# Altium PCB SimpleNYT.PcbDoc
Units mm, origin at the board's own origin, x right, y up, seen from the top; angles counter-clockwise.
Board outline 39 x 40 mm, 2 copper layers (Top Layer, Bottom Layer); 48 components, 44 nets, 166 pads, 2 vias.
Unrouted connection lines stored in the file: 1.
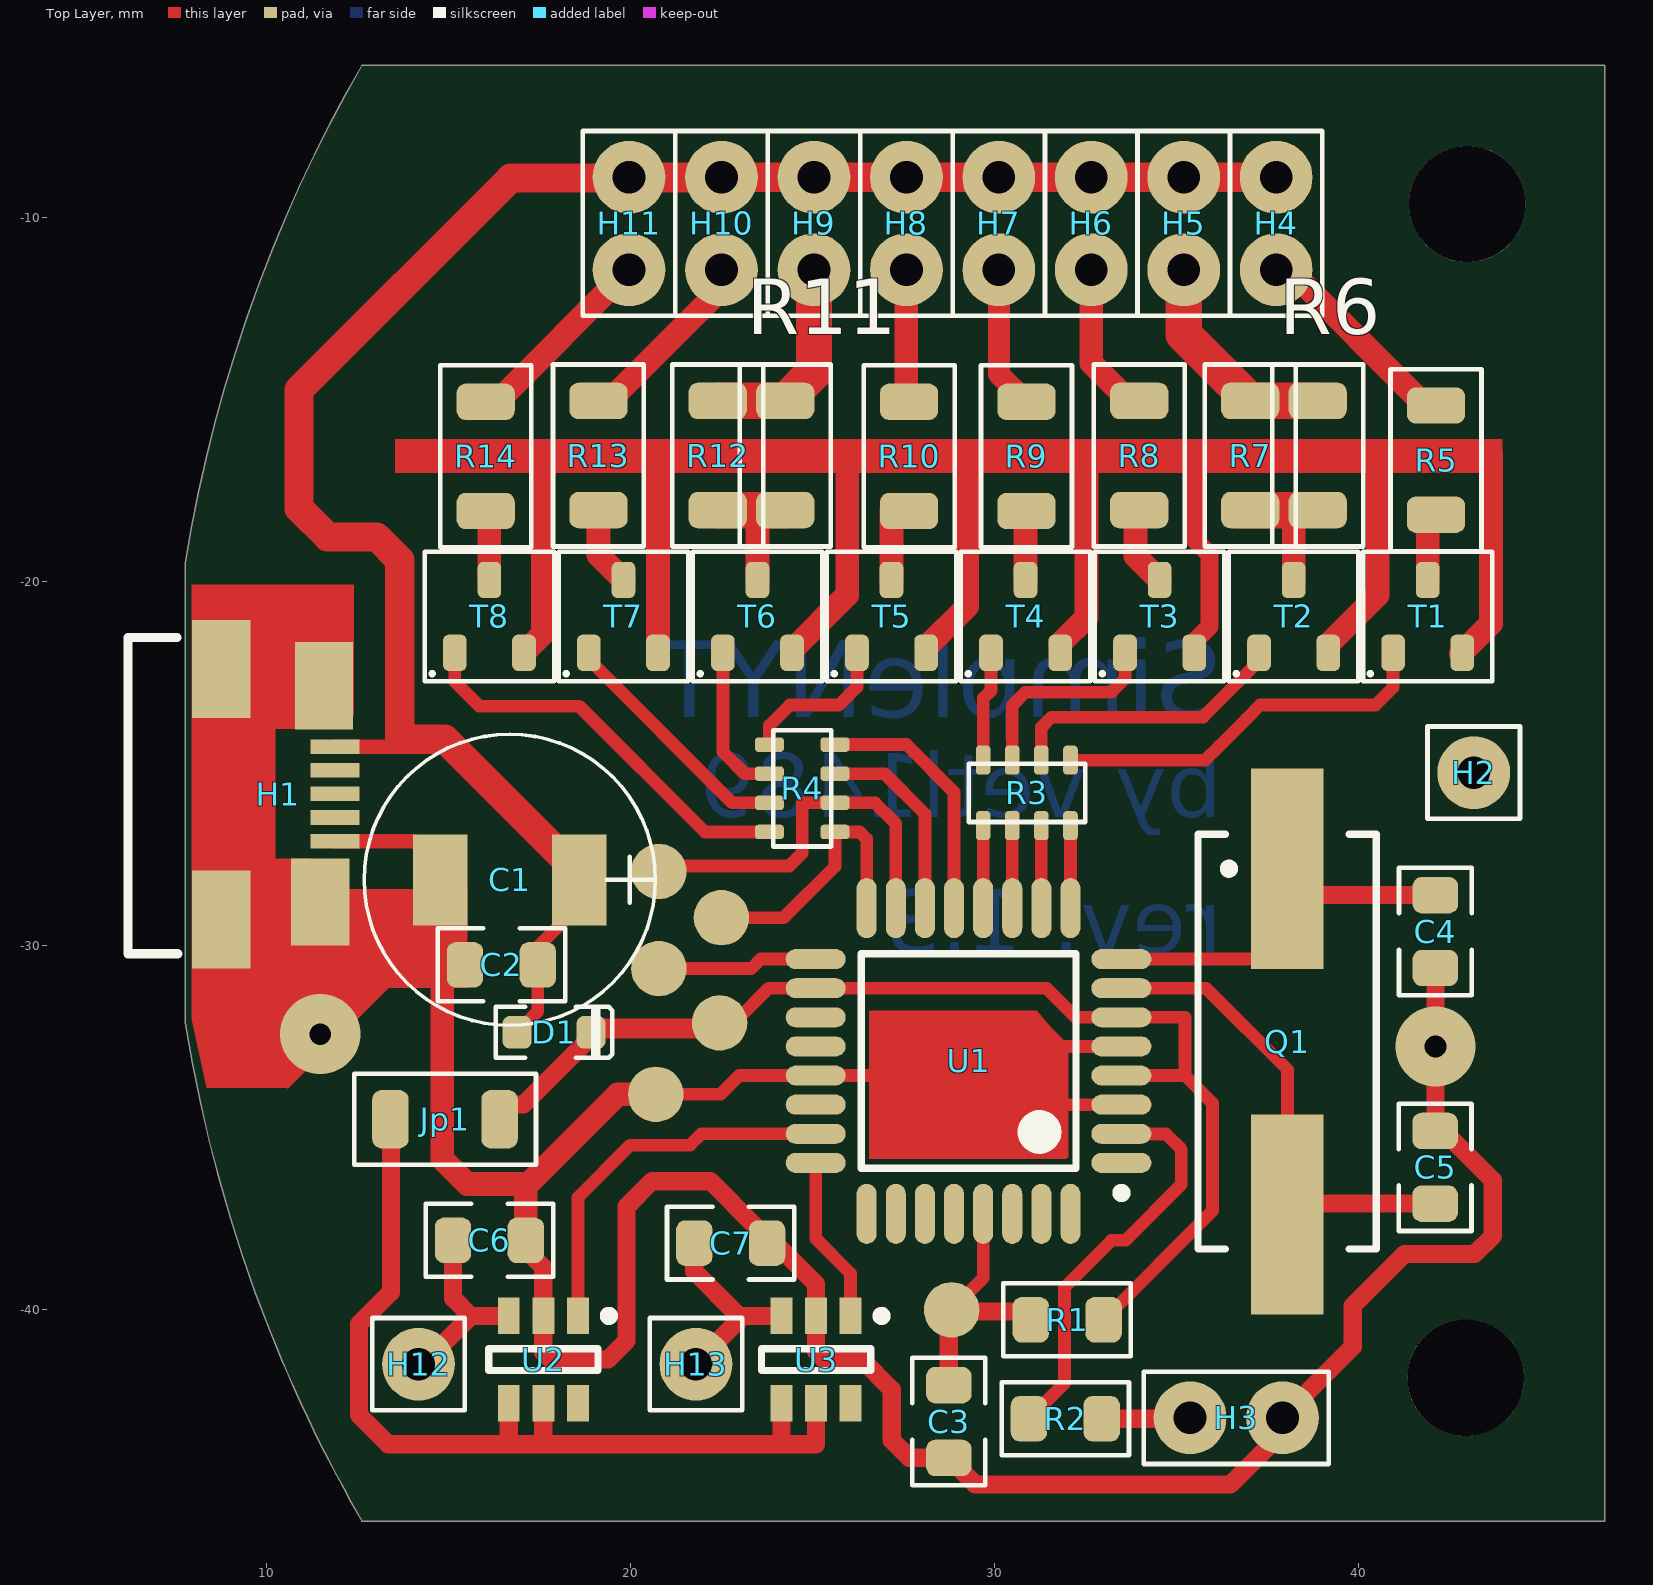
[diagram p0: Top Layer view]
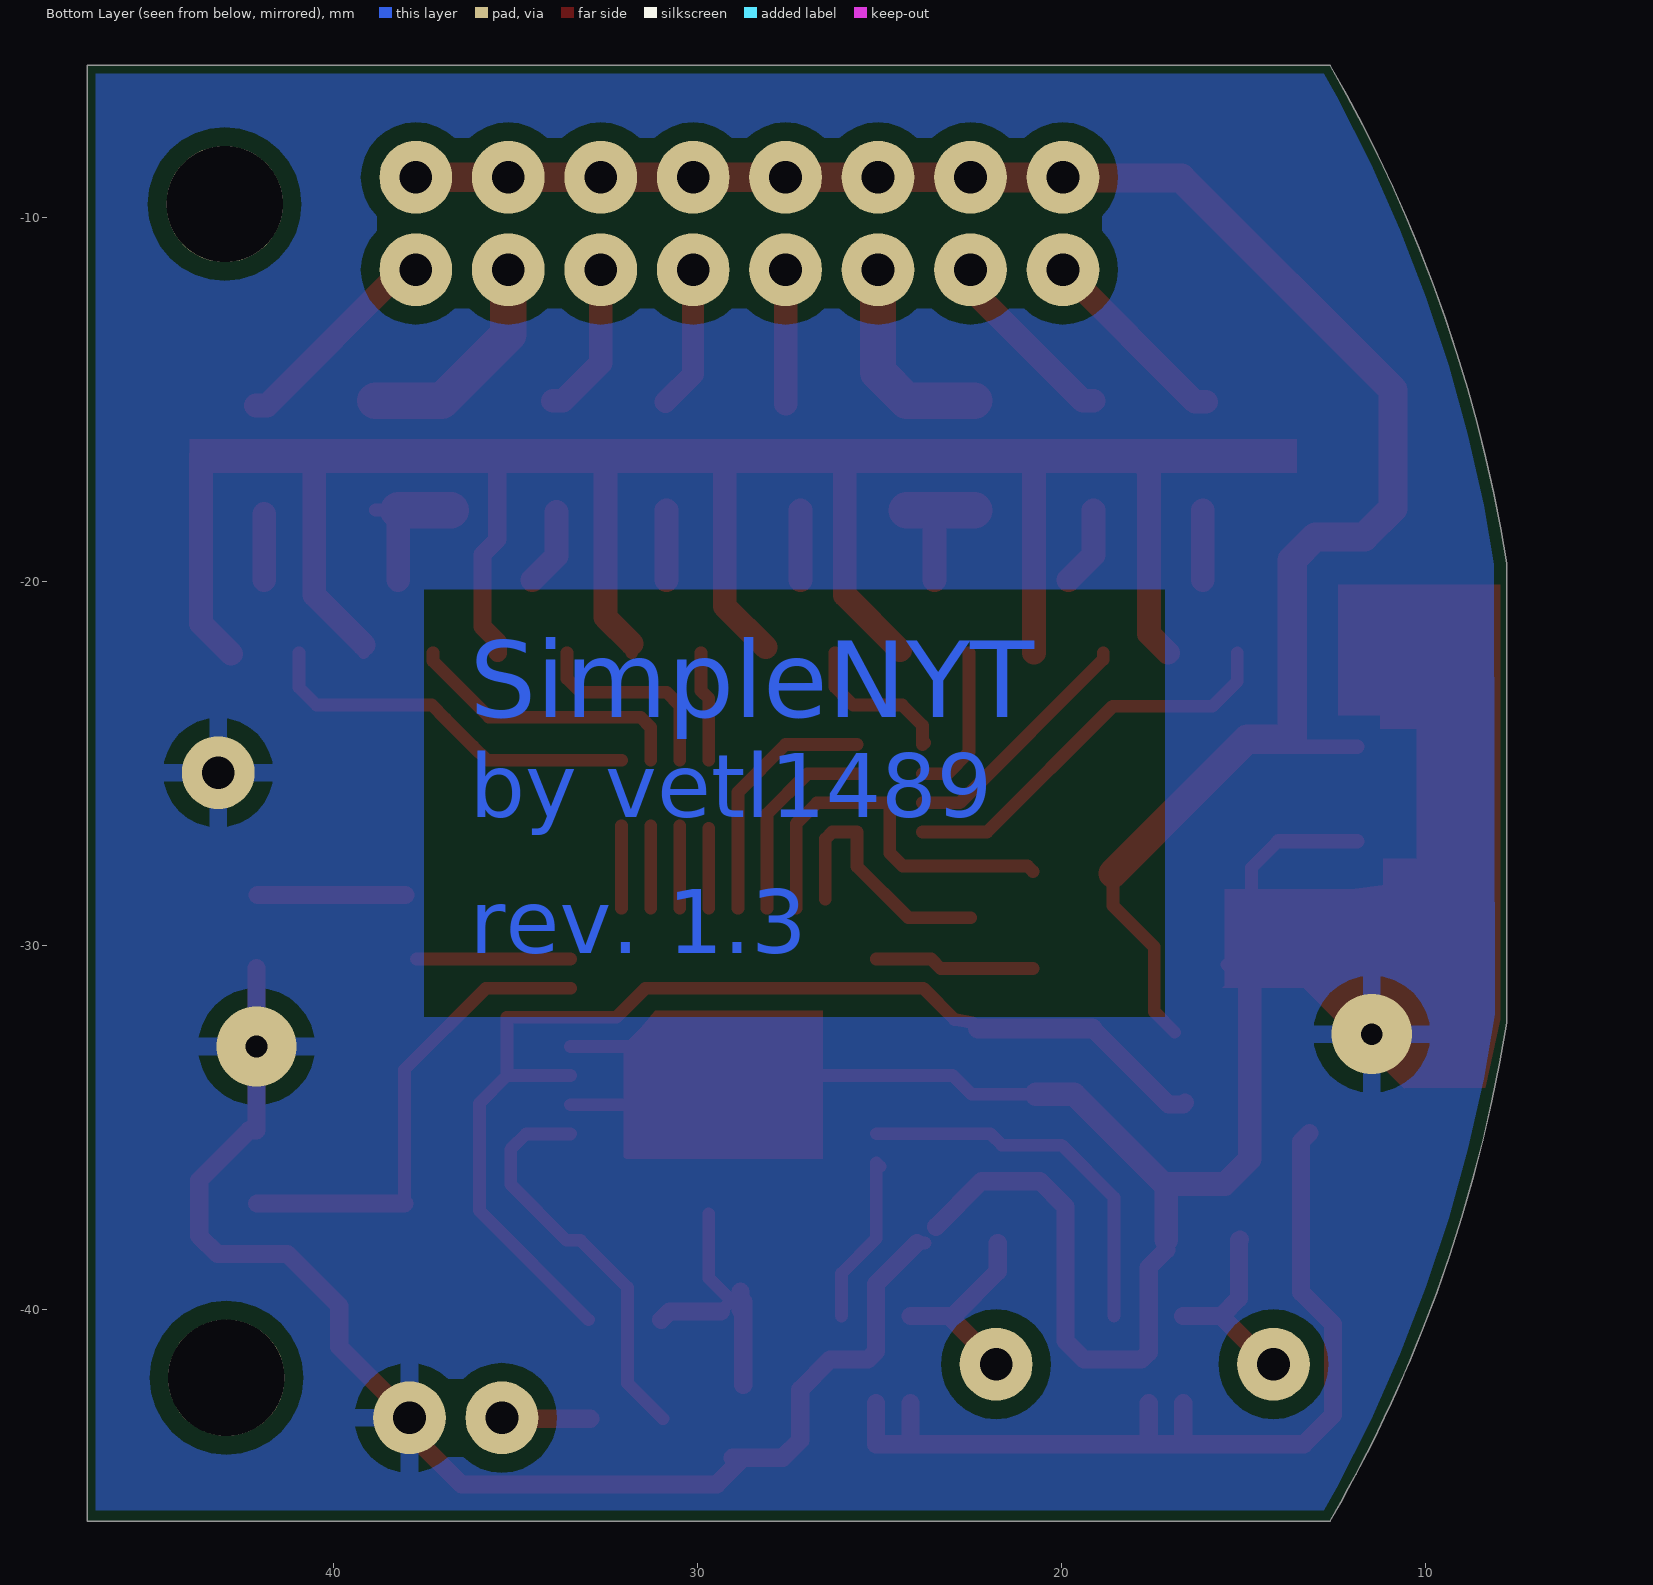
[diagram p1: Bottom Layer view, seen from below]
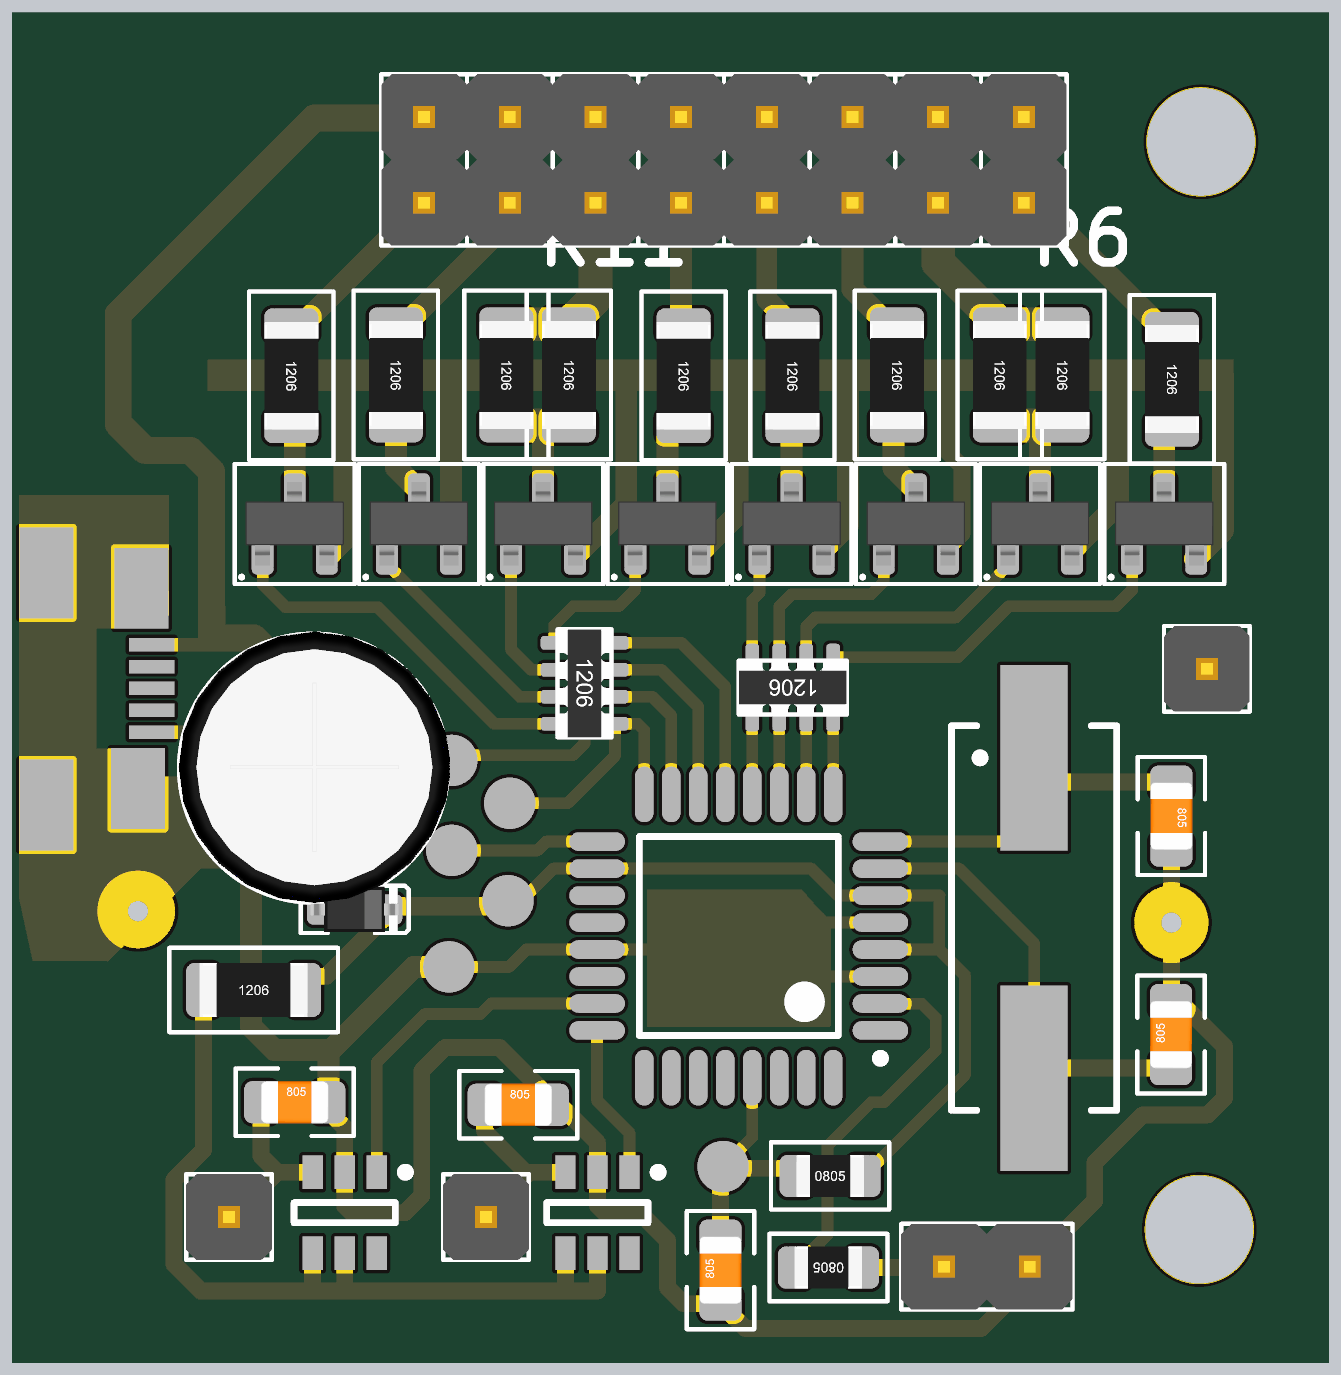
[diagram p2: 3D render of the assembled board from above, using the file's embedded part models]

## Layer stack, top to bottom
Top Solder: solder mask 0.0102, Solder Resist, Dk 3.5
Top Layer: signal copper 0.0356
Dielectric 1: dielectric 0.32, FR-4, Dk 4.8
Bottom Layer: signal copper 0.0356
Bottom Solder: solder mask 0.0102, Solder Resist, Dk 3.5

## Board outline
10.425,-41.383 cw(c48.201,-25.429) 10.092,-40.57 cw(c46.989,-25.907) 7.775,-32.125 7.775,-19.5 cw(c47.03,-25.731) 8.845,-14.7 cw(c47.291,-25.798) 10.171,-10.852 cw(c46.93,-25.651) 12.628,-5.812 46.775,-5.812 46.775,-45.812 12.628,-45.812 12.335,-45.298 cw(c46.396,-26.284) 11.913,-44.522 cw(c46.742,-26.101) 11.514,-43.746 cw(c47.096,-25.924) 11.134,-42.966 cw(c47.457,-25.753) 10.77,-42.176 cw(c47.825,-25.588)

## Design rules (kind name [scope] priority, off if disabled: settings)
Clearance Clearance_Polygon [InNet('GND') And InPolygon] p1: gap=0.5
Clearance [All] p2: gap=0.25
PlaneConnect [All] p1: planeconnectstyle=Relief reliefexpansion=0.508 reliefentries=4 reliefconductorwidth=0.35 reliefairgap=0.5
PolygonConnect [All] p1: connectstyle=Relief reliefconductorwidth=0.5 reliefentries=4 polygonreliefangle="90 Angle" airgapwidth=0.5
RoutingVias [All] p1: holewidth=0.711 width=1.27 viastyle="Through Hole" minholewidth=0.711 minwidth=1.27 maxholewidth=0.711 maxwidth=1.27
SolderMaskExpansion [All] p1: expansion=0.102
Width [All] p1: maxlimit=5.254 minlimit=0.254 preferedwidth=0.254
29 further rules are at their usual default settings.

## Components (designator, comment, footprint, x,y, rotation, side; value= is the part's Value field where it differs from the comment)
C1 "470u" El-d8-h12-F3.81 16.688,-28.194 r0 top
C2 "1u" C0805(2013) 16.459,-30.531 r180 top
C3 "100n" C0805(2013) 28.753,-43.078 r90 top
C4 "22p" C0805(2013) 42.122,-29.616 r270 top
C5 "22p" C0805(2013) 42.113,-36.093 r90 top
C6 "47p" C0805(2013) 16.129,-38.1 r0 top
C7 "47p" C0805(2013) 22.758,-38.176 r0 top
D1 "1N4148" SOD323 17.907,-32.385 r0 top
H1 "Micro USB B" DX4R005H91 9.804,-25.832 r270 top
H2 "H-1" J1 43.175,-25.25 r180 top
H3 "H-1x2" J1x2 36.652,-42.977 r0 top
H4 "H-1x2" J1x2 37.747,-10.16 r90 top
H5 "H-1x2" J1x2 35.207,-10.16 r90 top
H6 "H-1x2" J1x2 32.667,-10.16 r90 top
H7 "H-1x2" J1x2 30.127,-10.16 r90 top
H8 "H-1x2" J1x2 27.587,-10.16 r90 top
H9 "H-1x2" J1x2 25.047,-10.16 r90 top
H10 "H-1x2" J1x2 22.507,-10.16 r90 top
H11 "H-1x2" J1x2 19.967,-10.16 r90 top
H12 "H-1" J1 14.182,-41.503 r90 top
H13 "H-1" J1 21.802,-41.503 r90 top
Jp1 "0" J-1206 14.91,-34.773 r0 top
Q1 "16 MHz" HC49/4H_SMX 38.049,-32.639 r270 top
R1 "10k" R0805 32.004,-40.284 r0 top
R2 "1k" R0805 31.953,-43.002 r180 top
R3 "1k" RM4x0603 30.895,-25.806 r270 top
R4 "1k" RM4x0603 24.723,-25.679 r0 top
R5 "470" R1206 42.139,-16.662 r270 top
R6 "62" R1206 38.887,-16.535 r270 top
R7 "62" R1206 37.033,-16.535 r270 top
R8 "240" R1206 33.985,-16.535 r270 top
R9 "330" R1206 30.886,-16.561 r270 top
R10 "470" R1206 27.661,-16.561 r270 top
R11 "62" R1206 24.257,-16.535 r270 top
R12 "62" R1206 22.403,-16.535 r270 top
R13 "240" R1206 19.126,-16.535 r270 top
R14 "330" R1206 16.027,-16.561 r270 top
T1 "2N3904" SOT23 41.91,-20.955 r0 top
T2 "2N3904" SOT23 38.227,-20.955 r0 top
T3 "2N3904" SOT23 34.544,-20.955 r0 top
T4 "2N3904" SOT23 30.861,-20.955 r0 top
T5 "2N3904" SOT23 27.178,-20.955 r0 top
T6 "2N3904" SOT23 23.495,-20.955 r0 top
T7 "2N3904" SOT23 19.812,-20.955 r0 top
T8 "2N3904" SOT23 16.129,-20.955 r0 top
U1 "ATmega88A-AU" 32A_N 29.295,-33.172 r180 top
U2 "TTP223-BA6" SOT23-6 17.611,-41.376 r270 top
U3 "TTP223-BA6" SOT23-6 25.104,-41.376 r270 top

## Footprints (in the part's own frame and the unit in brackets; to place one, negate y for a bottom-side part, rotate by r counter-clockwise, add the part's x,y. Pads: shape width x height; smd on the part's side, far side on the other; paste and mask are expansions set on the pad)
32A_N [mm] "Thin QFP, 32-Leads, Body 7x7mm, Pitch 0.8mm, IPC Medium Density"
  oval 1.65x0.55 smd: 1(-4.2,2.8) 2(-4.2,2) 3(-4.2,1.2) 4(-4.2,0.4) 5(-4.2,-0.4) 6(-4.2,-1.2) 7(-4.2,-2) 8(-4.2,-2.8) 17(4.2,-2.8) 18(4.2,-2) 19(4.2,-1.2) 20(4.2,-0.4) 21(4.2,0.4) 22(4.2,1.2) 23(4.2,2) 24(4.2,2.8)
  oval 0.55x1.65 smd: 9(-2.8,-4.2) 10(-2,-4.2) 11(-1.2,-4.2) 12(-0.4,-4.2) 13(0.4,-4.2) 14(1.2,-4.2) 15(2,-4.2) 16(2.8,-4.2) 25(2.8,4.2) 26(2,4.2) 27(1.2,4.2) 28(0.4,4.2) 29(-0.4,4.2) 30(-1.2,4.2) 31(-2,4.2) 32(-2.8,4.2)
  silkscreen extent -4.33,-2.95 2.95,3.75, body extent -3.5,-3.5 3.5,3.5, height 1.2
C0805(2013) [mm]
  rrect50% 1x1.25 smd: 1(-1,0) 2(1,0)
  silkscreen extent -1.75,-1 1.75,1, body extent -1,-0.62 1,0.63, height 0.73
DX4R005H91 [mm]
  rect 0.4x1.35 smd: 1(-1.3,2.083) 2(-0.65,2.083) 3(0,2.083) 4(0.65,2.083) 5(1.3,2.083)
  rect 2.7x1.6 smd: 6(-3.429,-1.041) 6(3.454,-1.041)
  rect 2.4x1.6 smd: 6(-2.972,1.778) 6(2.972,1.676)
  Top Layer region: -4.775,-1.854 4.801,-1.854 4.801,0.446 -4.775,0.446
  Top Layer region: 1.778,-0.66 4.166,-0.66 4.166,1.372 1.778,1.372
  Top Layer region: -4.166,-0.229 -1.778,-0.229 -1.778,1.448 -4.166,1.448
  silkscreen extent -4.29,-3.61 4.39,-2.24
El-d8-h12-F3.81 [mm]
  rect 1.5x2.5 smd: 1(1.905,0) 2(-1.905,0)
  silkscreen extent -4,-4 4,4, body extent -4,-4 4.05,4.05, height 12.53
HC49/4H_SMX [mm] "Surface Mount Quartz Crystal; Body 13.4 (inc. leads) x 4.9 mm (LxW max)"
  rect 5.5x2 smd: 1(-4.75,0) 2(4.75,0)
  silkscreen extent -5.7,-2.45 5.7,2.45
J1 [mm]
  round 2 hole 0.9: 1(0,0)
  silkscreen extent -1.27,-1.27 1.27,1.27, body extent -1.27,-1.27 1.27,1.27, height 10.1
J1x2 [mm]
  round 2 hole 0.9: 1(-1.27,0) 2(1.27,0)
  silkscreen extent -2.54,-1.27 2.54,1.27, body extent -2.54,-1.27 2.54,1.27, height 10.1
J-1206 [mm]
  rrect50% 1x1.6 smd: 1(-1.5,0) 2(1.5,0)
  silkscreen extent -2.5,-1.25 2.5,1.25, body extent -1.6,-0.8 1.6,0.8, height 0.6
R0805 [mm]
  rrect50% 1x1.25 smd: 1(-1,0) 2(1,0)
  silkscreen extent -1.75,-1 1.75,1, body extent -1,-0.62 1,0.63, height 0.6
R1206 [mm]
  rrect50% 1x1.6 smd: 1(-1.5,0) 2(1.5,0)
  silkscreen extent -2.5,-1.25 2.5,1.25, body extent -1.6,-0.8 1.6,0.8, height 0.6
RM4x0603 [mm]
  rrect50% 0.8x0.4 smd: 1(-0.9,1.2) 2(-0.9,0.4) 3(-0.9,-0.4) 4(-0.9,-1.2) 5(0.9,-1.2) 6(0.9,-0.4) 7(0.9,0.4) 8(0.9,1.2)
  silkscreen extent -0.8,-1.6 0.8,1.6, body extent -0.8,-1.6 0.8,1.6, height 0.5
SOD323 [mm]
  rrect50% 0.8x0.9 smd: 1(-1.016,0) 2(1.016,0)
  silkscreen extent -1.6,-0.76 1.6,0.7, body extent -1.3,-0.67 1.3,0.67, height 1.1
SOT23 [mm] "SOT-23; 3 Leads; Body 3.0 x 2.6 mm Pitch 0.95mm"
  rrect50% 0.65x1 smd: 1(-0.95,-1) 2(0.95,-1) 3(0,1)
  silkscreen extent -1.78,-1.78 1.78,1.78, body extent -1.46,-1.23 1.46,1.24, height 1
SOT23-6 [mm] "SOT23, 6-Leads, Body 2,90x2,45mm, Pitch 0,95mm, IPC Medium Density"
  rect 1x0.6 smd: 1(-1.2,0.95) 2(-1.2,0) 3(-1.2,-0.95) 4(1.2,-0.95) 5(1.2,0) 6(1.2,0.95)
  silkscreen extent -1.32,-1.5 0.3,1.93, body extent -0.7,-1.5 0.7,1.5, height 1.1

## Part data
C1: library part 470u-16V, "16V"
C2 C3 C4 C5 C6 C7: library part C-0805, "SMD-0805"
D1: "DO-35 75V 0.2A 1uS 4A 4nS"
H1: "DX4R005H91"
Jp1: library part Jp-1206, "SMD-1206-om"
Q1: library part HC49/4H_SMX, "Surface Mount Quartz Crystal"
R1 R2: library part R-0805, "SMD 0805 0.1W 5% 150V"
R3 R4: library part 4RM-0603, "SMD 4RM-0603 1\16W 5%"
R5 R6 R7 R8 R9 R10 R11 R12 R13 R14: library part R-1206, "SMD 1206 0.125W 5% 200V"
T1 T2 T3 T4 T5 T6 T7 T8: library part BC847C, "SMD-SOT23"
U1: "8-bit AVR Microcontroller, 8KB Flash, 512 Bytes EEPROM, 1KB SRAM, 32-pin TQFP, Industrial Grade (-40°C to 85°C)"
U2 U3: "Touch pad detector IC"

## Free pads (board coordinates)
  round 1.524 smd: 2(20.701,-34.087) 2(20.786,-30.632) 2(20.786,-27.965) 2(22.454,-32.126) 2(22.504,-29.235) 2(28.829,-40.009)
  round 3.2 hole 3.2: 3(42.95,-41.875) 3(43,-9.625)

## Via types
v1: diameter 2.2/2.2 (per signal layer), hole 0.6, Top Layer to Bottom Layer, 1 vias
v2: diameter 2.2, hole 0.6, Top Layer to Bottom Layer, 1 vias

## Nets (pads, with @x,y where several pads share a name; then routed paths per layer and width w, separated by ;. In a path a pad name is that pad's centre, name@x,y a point inside that pad or via, vN(x,y) a via of type N, cw(c..) or ccw(c..) an arc to the next point about the centre after c; other vN are vias at no path point)
CH1: R3.8 U1.9 | length 2.3
  Top Layer w0.35: U1.9 R3.8
CH2: R3.7 U1.10 | length 2.3
  Top Layer w0.35: U1.10 R3.7
CH3: R3.6 U1.11 | length 2.3
  Top Layer w0.35: U1.11 R3.6@30.495,-26.706
CH4: R3.5 U1.12 | length 2.2
  Top Layer w0.35: U1.12 R3.5@29.695,-26.782
CH5: R4.8 U1.13 | length 7
  Top Layer w0.35: R4.8 27.587,-24.479 28.895,-25.787 U1.13
CH6: R4.7 U1.14 | length 5.5
  Top Layer w0.35: R4.7 26.99,-25.279 28.095,-26.384 U1.14
FDBCK: R2.2 U1.2 | length 11.2
  Top Layer w0.35: R2.2 31.928,-42.028 31.928,-40.941 31.929,-40.94 31.929,-39.394 33.223,-38.1 33.604,-38.1 35.137,-36.567 35.137,-35.594 34.721,-35.179 33.502,-35.179 U1.2
GND: C1.2 C2.2 C3.1 C4.2 C5.2 C6.2 C7.2 H1.5 H1.6 H2.1 H3.2 pad.2@20.701,-34.087 T1.2 T2.2 T3.2 T4.2 T5.2 T6.2 T7.2 T8.2 U1.3 U1.5 U1.21 U2.2 U3.2 | length 141.8
  Top Layer w0.35: H1.6@8.763,-29.286 9.246,-28.804 H1.6@11.481,-28.804 ; H1.6@8.763,-22.403 11.125,-22.403 H1.6@11.582,-22.86 ; C1.2@14.051,-27.132 14.783,-27.864 14.783,-29.854 C2.2 14.834,-31.156 ; C6.2@17.129,-38.363 C6.2 ; pad.2@20.701,-34.087 22.479,-34.087 22.994,-33.572 U1.21 31.695,-33.572 31.714,-33.553 ; C7.2 C7.2@23.978,-38.176 ; T6.2 T6.2@24.445,-21.885 ; 25.375,-16.459 25.959,-17.043 ; T5.2 T5.2@28.128,-21.808 ; T4.2 T4.2@31.811,-21.707 ; U1.3 31.816,-34.372 31.714,-34.271 31.714,-33.553 ; U1.5 31.714,-32.772 31.714,-33.553 ; T2.2 T2.2@39.177,-21.732 ; T1.2@42.821,-21.98 T1.2@42.821,-21.808
  Top Layer w0.4: H1.5 C1.2@14.051,-27.132
  Top Layer w0.5: C6.2@17.129,-38.363 17.611,-38.845 U2.2 17.611,-41.182 17.805,-41.376 19.389,-41.376 19.897,-40.868 19.897,-37.177 20.599,-36.474 22.2,-36.474 C7.2@23.453,-37.728 ; C7.2@23.978,-38.176 25.104,-39.303 U3.2 25.104,-41.157 25.324,-41.377 26.362,-41.377 27.183,-42.198 27.183,-43.591 27.665,-44.074 C3.1@29.037,-44.074 ; C3.1 29.48,-44.806 36.494,-44.806 37.65,-43.65 37.65,-43.225 39.85,-41.025 39.85,-39.9 41.275,-38.475 43.2,-38.475 43.7,-37.975 43.7,-36.45 42.327,-35.077 42.122,-35.077 C4.2 ; T3.2 35.494,-21.656 35.919,-21.231 35.919,-19.257 35.509,-18.847 35.509,-16.637 35.662,-16.485
  Top Layer w0.65: 14.834,-31.156 14.834,-35.865 15.519,-36.551 17.129,-36.551 ; T8.2 17.602,-21.432 17.602,-16.916 17.983,-16.535 ; C6.2 17.129,-36.617 19.66,-34.087 pad.2@20.701,-34.087 ; T7.2 20.762,-16.576 20.828,-16.51 21.666,-16.51 ; T6.2@24.445,-21.885 25.959,-20.371 25.959,-17.043 ; T5.2@28.128,-21.808 29.261,-20.676 29.261,-16.764 29.007,-16.51 ; T4.2@31.811,-21.707 32.534,-20.984 32.534,-16.659 ; T2.2@39.177,-21.732 40.538,-20.371 40.538,-16.561 40.513,-16.535 40.03,-16.535 ; T1.2@42.821,-21.98 43.649,-21.152 43.649,-16.51
  other v1: 42.122,-32.775
  other v2: 11.481,-32.436
INT0: U1.23 U2.1 | length 10.5
  Top Layer w0.35: U2.1 18.561,-36.921 19.998,-35.484 21.641,-35.484 21.953,-35.172 U1.23
INT1: U1.24 U3.1 | length 4.7
  Top Layer w0.35: U1.24@24.996,-36.071 U1.24 25.095,-38.049 26.054,-39.008 U3.1
MCVCC: D1.2 Jp1.1 Jp1.2 pad.2@22.454,-32.126 R1.2 U1.4 U1.6 U1.18 U2.4 U2.5 U3.4 U3.5 | length 57.3
  Top Layer w0.35: pad.2@22.306,-32.283 22.454,-32.126 22.945,-32.029 23.802,-31.172 U1.18 31.435,-31.172 32.235,-31.972 U1.6 35.245,-31.972 35.239,-31.978 35.239,-33.572 ; R1.2 36.001,-37.288 36.001,-34.334 35.239,-33.572 ; U1.4 35.239,-33.572
  Top Layer w0.5: Jp1.1@13.191,-35.153 13.425,-35.387 13.425,-39.525 12.55,-40.4 12.55,-42.903 13.347,-43.7 17.611,-43.7 ; Jp1.2@16.612,-34.315 16.662,-34.366 17.069,-34.366 D1.2@19.152,-32.283 ; 16.661,-43.637 U2.4 ; U2.5 17.611,-43.7 ; 24.154,-43.586 U3.4 ; U3.5 25.104,-43.7 17.611,-43.7
  Top Layer w0.55: D1.2@19.152,-32.283 pad.2@22.306,-32.283
MISO/CH8: pad.2@22.504,-29.235 R4.5 U1.16 | length 7.3
  Top Layer w0.35: pad.2@22.504,-29.235 24.215,-29.235 25.623,-27.827 R4.5 26.304,-26.879 26.495,-27.07 U1.16@26.495,-28.727
MOSI/CH7: pad.2@20.786,-27.965 R4.6 U1.15 | length 10.7
  Top Layer w0.35: pad.2@20.786,-27.965 20.938,-27.813 24.367,-27.813 24.723,-27.457 24.723,-26.079 R4.6 26.723,-26.079 27.295,-26.651 U1.15
NetC4_1: C4.1 Q1.1 U1.8 | length 8.3
  Top Layer w0.35: U1.8 Q1.1@37.725,-30.372
  Top Layer w0.5: Q1.1@38.034,-28.609 C4.1@42.089,-28.609
NetC5_1: C5.1 Q1.2 U1.7 | length 13.2
  Top Layer w0.35: U1.7 35.82,-31.172 38.058,-33.41 Q1.2@38.058,-37.084
  Top Layer w0.5: Q1.2@38.058,-37.084 C5.1@42.113,-37.084
NetC6_1: C6.1 H12.1 U2.3 | length 6.8
  Top Layer w0.5: H12.1@13.801,-41.503 14.301,-41.503 15.628,-40.176 U2.3 15.614,-40.176 15.129,-39.691 C6.1 C6.1@15.103,-38.074
NetC7_1: C7.1 H13.1 U3.3 | length 7
  Top Layer w0.5: H13.1@21.421,-41.503 21.768,-41.503 23.095,-40.176 U3.3 22.98,-40.176 21.758,-38.954 C7.1
NetH3_1: H3.1 R2.1 | length 2.4
  Top Layer w0.5: R2.1 35.357,-43.002 H3.1
NetH4_1: H4.1 R5.1 | length 5.9
  Top Layer w0.35: H4.1 H4.1@38.105,-11.43
  Top Layer w0.65: H4.1@38.105,-11.43 41.837,-15.162 R5.1
NetH5_1: H5.1 R6.1 R7.1 | length 6.2
  Top Layer w1: H5.1@35.227,-11.45 H5.1 35.207,-13.209 R7.1 38.227,-15.035 R6.1@38.862,-15.035
NetH6_1: H6.1 R8.1 | length 4.3
  Top Layer w0.65: H6.1 32.667,-13.992 33.71,-15.035 R8.1
NetH7_1: H7.1 R9.1 | length 3.9
  Top Layer w0.6: H7.1 30.127,-14.301 R9.1
NetH8_1: H8.1 R10.1 | length 3.6
  Top Layer w0.65: R10.1@27.586,-15.111 H8.1@27.586,-11.554
NetH9_1: H9.1 R11.1 R12.1 | length 5.8
  Top Layer w1: R12.1 R11.1 25.047,-14.246 H9.1
NetH10_1: H10.1 R13.1 | length 5.2
  Top Layer w0.35: H10.1@22.507,-11.943 H10.1
  Top Layer w0.65: R13.1 19.415,-15.035 H10.1@22.507,-11.943
NetH11_1: H11.1 R14.1 | length 5.4
  Top Layer w0.65: R14.1 16.335,-15.061 H11.1
NetR3_1: R3.1 T1.1 | length 10.6
  Top Layer w0.35: R3.1 35.794,-24.906 36.172,-24.528 36.929,-23.771 37.307,-23.393 40.474,-23.393 40.96,-22.907 T1.1
NetR3_2: R3.2 T2.1 | length 7.9
  Top Layer w0.35: R3.2 31.295,-24.001 31.572,-23.724 35.738,-23.724 37.277,-22.184 T2.1
NetR3_3: R3.3 T3.1 | length 5.6
  Top Layer w0.35: R3.3 30.495,-23.404 30.861,-23.038 33.223,-23.038 33.594,-22.667 T3.1
NetR3_4: R3.4 T4.1 | length 3
  Top Layer w0.35: R3.4 29.695,-23.213 29.911,-22.997 T4.1
NetR4_1: R4.1 T5.1 | length 4.4
  Top Layer w0.35: R4.1@23.773,-24.429 R4.1 23.823,-23.954 24.384,-23.393 25.73,-23.393 26.228,-22.896 T5.1
NetR4_2: R4.2 T6.1 | length 4.3
  Top Layer w0.35: T6.1 22.545,-24.679 23.145,-25.279 R4.2
NetR4_3: R4.3 T7.1 | length 6.8
  Top Layer w0.35: T7.1 18.862,-22.139 22.802,-26.079 R4.3
NetR4_4: R4.4 T8.1 | length 11.1
  Top Layer w0.35: T8.1 15.179,-22.748 15.856,-23.425 18.599,-23.425 22.053,-26.879 R4.4
NetR5_2: R5.2 T1.3 | length 1.8
  Top Layer w0.65: T1.3 R5.2@41.91,-18.137
NetR6_2: R6.2 R7.2 T2.3 | length 4
  Top Layer w0.35: R6.2@38.227,-18.035 R6.2@38.862,-18.035
  Top Layer w0.65: T2.3 R6.2@38.227,-18.035
  Top Layer w1: R7.2@36.779,-18.035 R6.2@38.227,-18.035
NetR8_2: R8.2 T3.3 | length 2.1
  Top Layer w0.65: R8.2@33.884,-18.086 33.884,-19.295 T3.3
NetR9_2: R9.2 T4.3 | length 1.9
  Top Layer w0.65: T4.3 R9.2@30.861,-18.035
NetR10_2: R10.2 T5.3 | length 1.9
  Top Layer w0.65: T5.3 R10.2@27.178,-18.035
NetR11_2: R11.2 R12.2 T6.3 | length 3.7
  Top Layer w0.65: T6.3 R11.2@23.495,-18.059
  Top Layer w1: R12.2 R11.2
NetR13_2: R13.2 T7.3 | length 2.2
  Top Layer w0.65: R13.2 19.126,-19.269 T7.3
NetR14_2: R14.2 T8.3 | length 1.9
  Top Layer w0.65: T8.3 R14.2@16.129,-18.035
RESET: C3.2 pad.2@28.829,-40.009 R1.1 U1.29 | length 8.3
  Top Layer w0.35: pad.2@28.829,-40.009 29.695,-39.143 U1.29 ; pad.2@28.829,-39.514 pad.2@29.371,-40.056
  Top Layer w0.5: C3.2 pad.2@28.753,-39.779 ; pad.2@28.829,-40.009 pad.2@28.829,-39.514 ; pad.2@29.371,-40.056 30.775,-40.056 R1.1
VCC: C1.1 C2.1 D1.1 H1.1 H4.2 H5.2 H6.2 H7.2 H8.2 H9.2 H10.2 H11.2 | length 57.2
  Top Layer w0.35: 13.716,-24.333 13.716,-23.546 ; D1.1 17.459,-31.817 C2.1 17.459,-30.039 18.593,-28.905 C1.1@18.593,-28.016
  Top Layer w0.4: H1.1 13.665,-24.532
  Top Layer w0.8: 13.665,-23.495 13.665,-19.406 13.03,-18.771 11.684,-18.771 10.897,-17.983 10.897,-14.732 16.713,-8.915 H10.2@22.459,-8.915 ; 13.716,-24.333 14.91,-24.333 C1.1@18.593,-28.016 ; H11.2@19.459,-8.915 H11.2@19.967,-9.423 ; H11.2 H10.2 H9.2 H8.2 H7.2 H6.2 H5.2 H4.2
pads on no net: H1.2 H1.3 H1.4 U1.1 U1.17 U1.19 U1.20 U1.22 U1.25 U1.26 U1.27 U1.28 U1.30 U1.31 U1.32 U2.6 U3.6
copper on no net: | length 4.4
  Top Layer w0.35: 20.786,-30.632 23.326,-30.632 23.586,-30.372 25.095,-30.372

## Polygon pours and split planes (outlines as drawn)
GND on Bottom Layer "re" (solid, pour order 8): 46.542,-6.045 12.802,-6.045 ccw(c47.994,-25.781) 12.802,-45.517 46.542,-45.517

## Other copper
Top Layer:
  rectangle net GND: 13.538,-17.018 43.967,-16.078
  rectangle net VCC: 13.259,-24.532 14.072,-23.393
  region net GND: 26.568,-31.793 26.568,-35.865 31.979,-35.865 32.029,-35.814 32.029,-32.721 31.569,-32.261 31.166,-31.793
  region net GND: 8.255,-29.159 8.255,-27.965 12.04,-28.448 15.519,-28.448 15.519,-31.09 15.596,-31.166 13.36,-31.166 10.592,-33.934 10.566,-33.909 8.357,-33.909 7.95,-32.029 7.95,-30.632
  region net GND: 8.103,-23.673 12.395,-23.673 12.395,-20.091 7.95,-20.091 7.95,-20.523 7.95,-21.057
Bottom Layer:
  pour cut-out: 5.791,-32.066 8.103,-32.066 8.128,-19.456 6.731,-19.456 6.095,-17.896 5.079,-18.912 5.079,-33.136
  pour cut-out: 17.17,-20.218 37.515,-20.218 37.515,-31.953 17.17,-31.953
  text "SimpleNYT" at 36.271,-24.409 h3.6
  text "by vetl1489" at 36.271,-27.049 h3
  text "rev. 1.3" at 36.271,-30.785 h3

## Silkscreen, mask and mechanical layers (free items; w line width, h text height)
Mechanical 1:
  lines w0.127: 7.775,-32.125 ccw(c46.989,-25.907) 10.092,-40.57 ccw(c48.201,-25.429) 10.425,-41.383 ccw(c47.825,-25.588) 10.77,-42.176 ccw(c47.457,-25.753) 11.134,-42.966 ccw(c47.096,-25.924) 11.514,-43.746 ccw(c46.742,-26.101) 11.913,-44.522 ccw(c46.396,-26.284) 12.335,-45.298 12.628,-45.812 46.775,-45.812 46.775,-40.57 46.775,-14.7 46.775,-5.812 12.628,-5.812 ccw(c46.93,-25.651) 10.171,-10.852 ccw(c47.291,-25.798) 8.845,-14.7 ccw(c47.03,-25.731) 7.775,-19.5 7.775,-32.125